# Altium PCB ThrusterBoard.PcbDoc
Units mil, origin at the board's own origin, x right, y up, seen from the top; angles counter-clockwise.
Board outline 11310 x 5450 mil, 2 copper layers (Top Layer, Bottom Layer); 24 components, 44 nets, 165 pads, 0 vias.
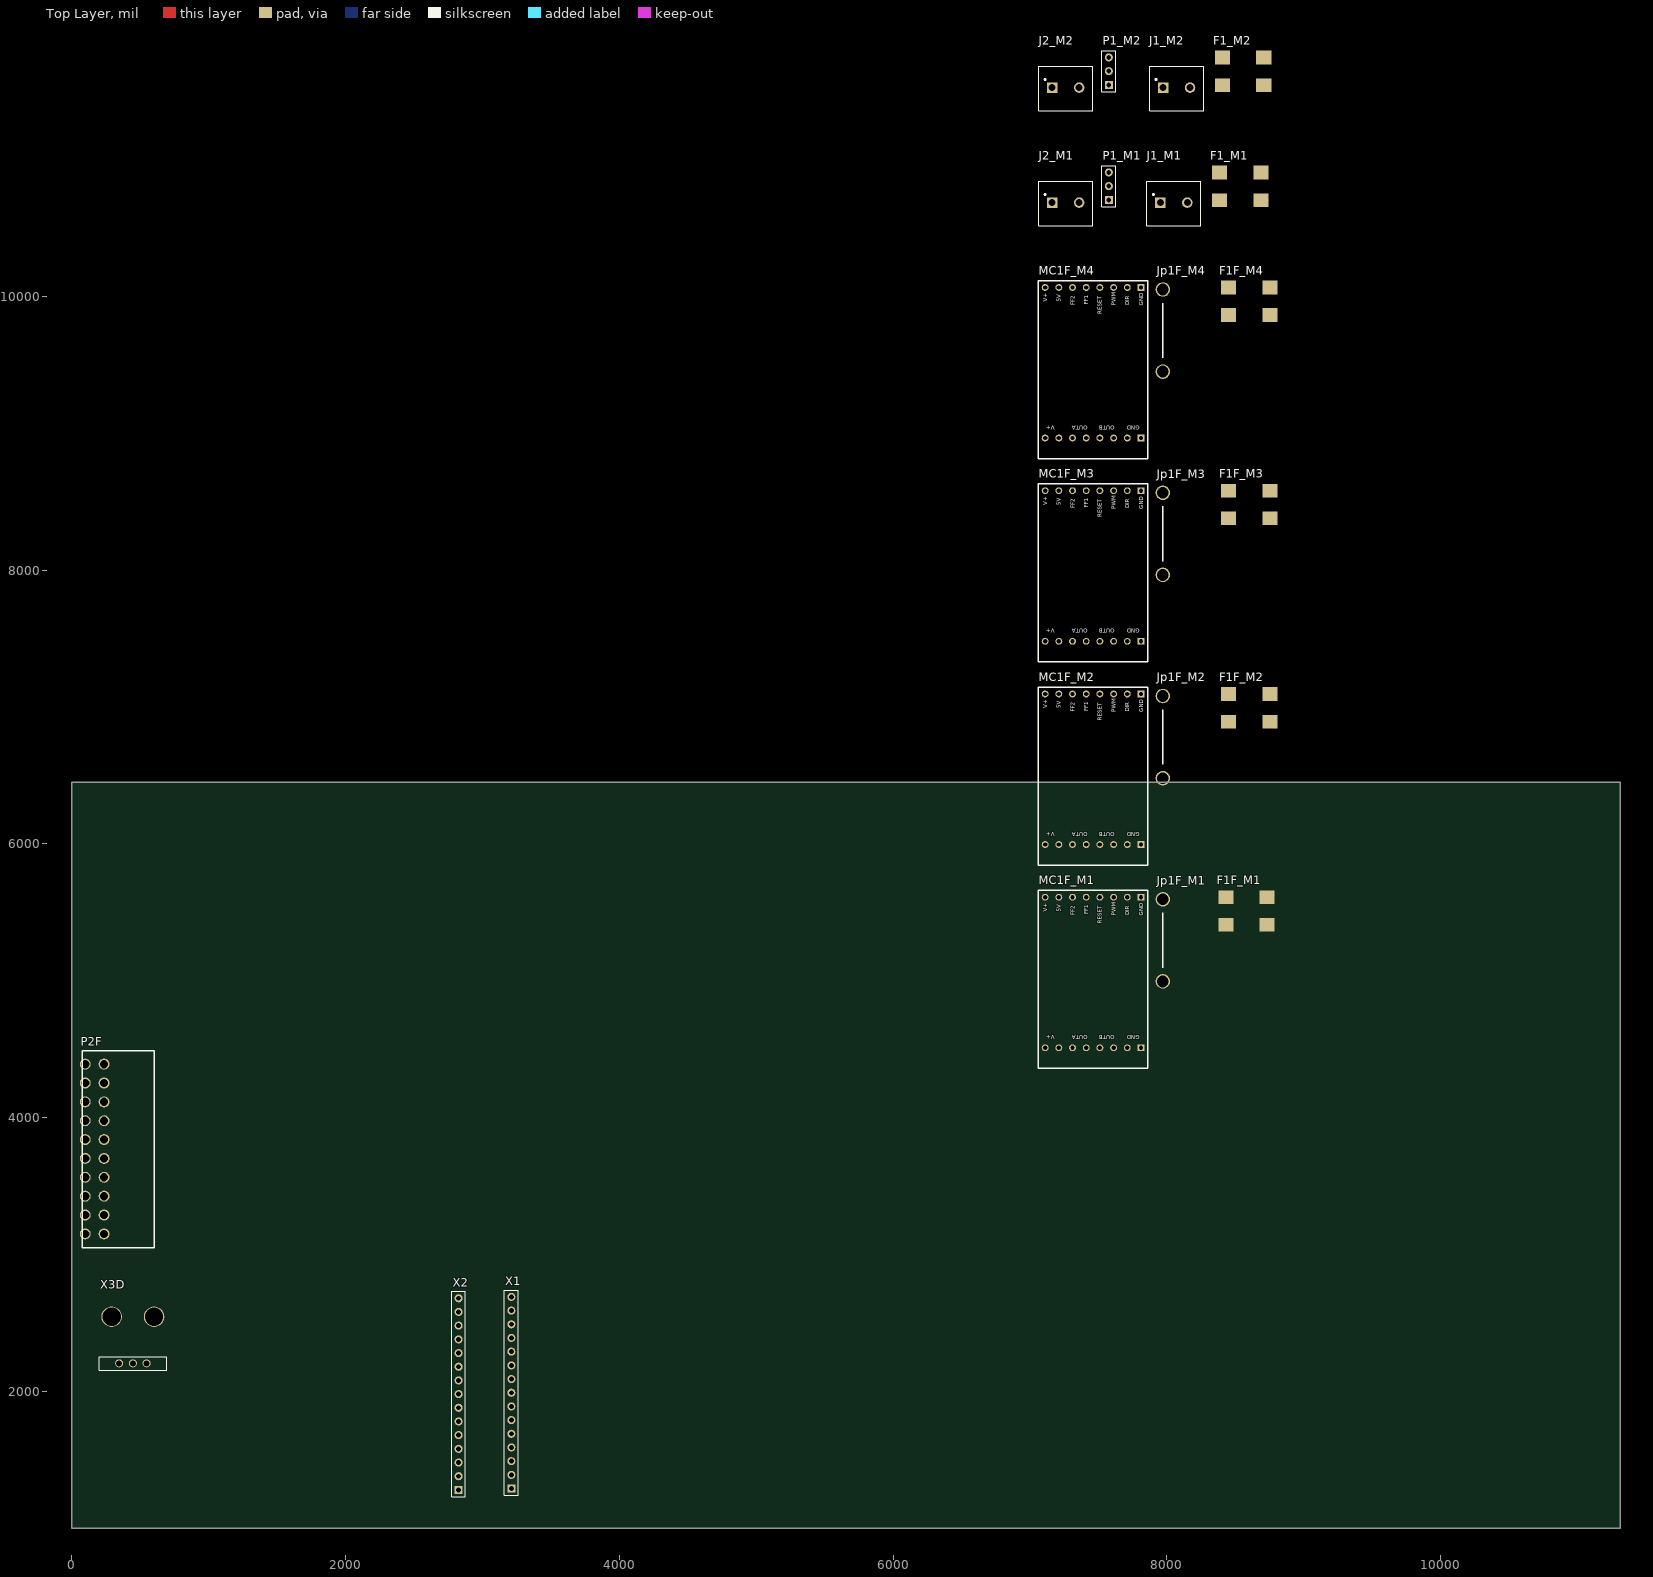
[diagram p0: Top Layer view]
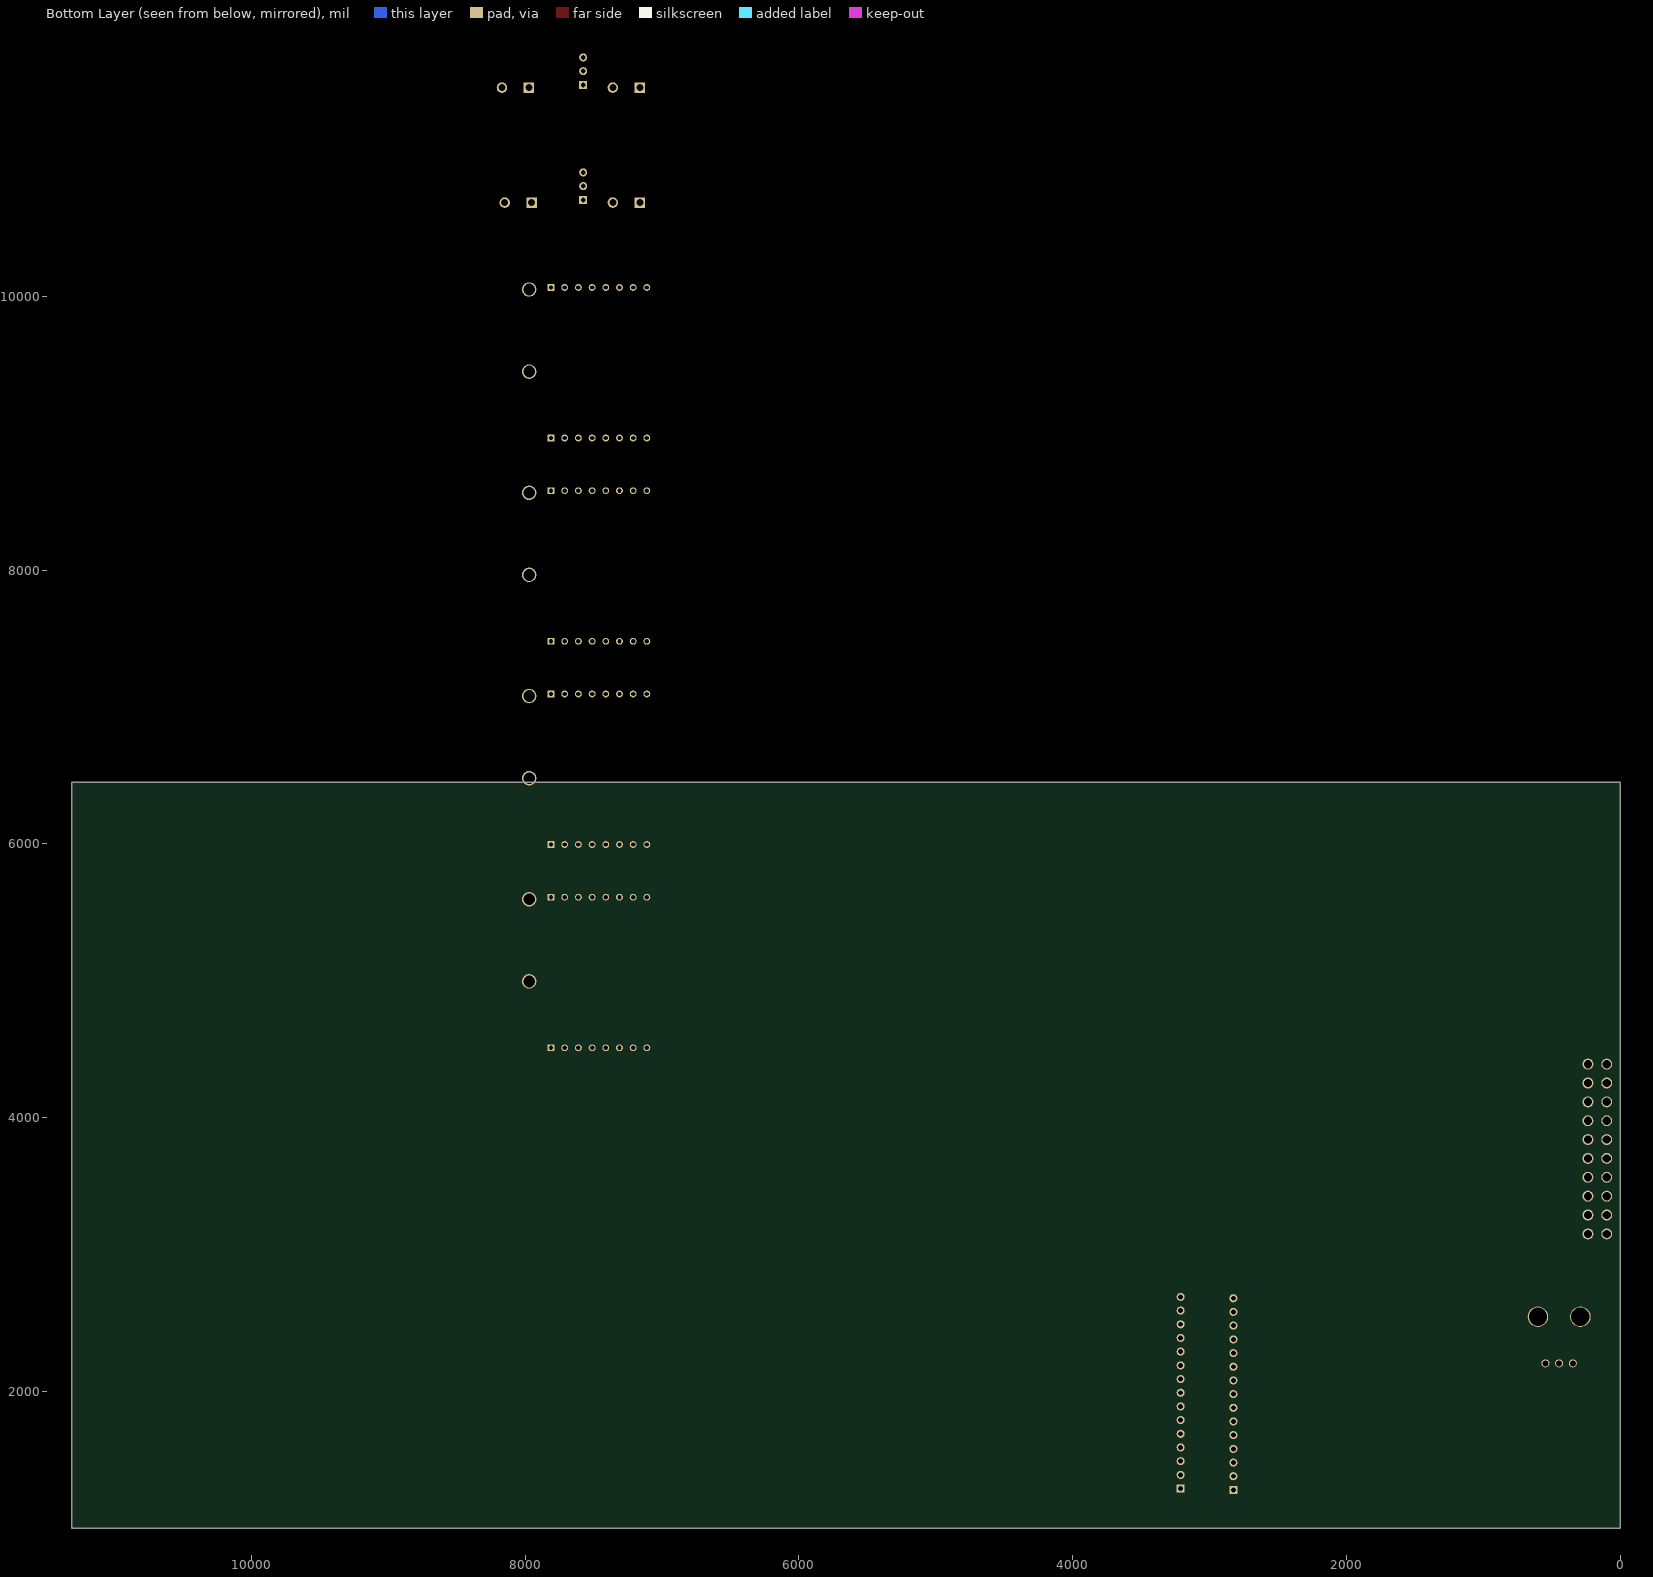
[diagram p1: Bottom Layer view, seen from below]

## Layer stack, top to bottom
Top Solder: solder mask 0.4, Solder Resist, Dk 3.5
Top Layer: signal copper 1.4
Dielectric 1: dielectric 12.6, FR-4, Dk 4.8
Bottom Layer: signal copper 1.4
Bottom Solder: solder mask 0.4, Solder Resist, Dk 3.5

## Board outline
0,1000 11310,1000 11310,6450 0,6450

## Design rules (kind name [scope] priority, off if disabled: settings)
Clearance [All] p1: gap=10 ignorepadtopadclearanceinfootprint=FALSE except(0: Arc-Hole Track-Hole SMDPad-Hole THPad-Hole Via-Hole Fill-Hole Poly-Hole Region-Hole Text-Hole)
PolygonConnect [All] p1: connectstyle=Relief reliefconductorwidth=10 reliefentries=4 polygonreliefangle="90 Angle" airgapwidth=10
RoomDefinition "Thruster Board" [InComponentClass('Thruster Board')] p1: confinementstyle=ConfineIn formatcopy=TRUE lockcomponents=FALSE outline 7755,0 8595,0 8595,1620 7755,1620
RoomDefinition "Motor Control" [InComponentClass('Motor Control')] p2: confinementstyle=ConfineIn formatcopy=TRUE lockcomponents=FALSE outline 5247.2,-941.77 6467.2,-941.77 6467.2,623.23 5247.2,623.23
RoomDefinition M4 [InComponentClass('M4')] p3: confinementstyle=ConfineIn formatcopy=TRUE lockcomponents=FALSE outline 7045,8805 8835,8805 8835,10235 7045,10235
RoomDefinition M3 [InComponentClass('M3')] p4: confinementstyle=ConfineIn formatcopy=TRUE lockcomponents=FALSE outline 7045,7320 8835,7320 8835,8750 7045,8750
RoomDefinition M_2 [InComponentClass('M2')] p5: confinementstyle=ConfineIn formatcopy=TRUE lockcomponents=FALSE outline 7045,5835 8835,5835 8835,7265 7045,7265
RoomDefinition M2 [InComponentClass('M2')] p6: confinementstyle=ConfineIn formatcopy=TRUE lockcomponents=FALSE outline 7045,5835 8835,5835 8835,7265 7045,7265
RoomDefinition M_1 [InComponentClass('M1')] p7: confinementstyle=ConfineIn formatcopy=TRUE lockcomponents=FALSE outline 12180,530 13950,530 13950,1960 12180,1960
RoomDefinition M1 [InComponentClass('M1')] p8: confinementstyle=ConfineIn formatcopy=TRUE lockcomponents=FALSE outline 7045,4350 8815,4350 8815,5780 7045,5780
RoutingVias [All] p1: holewidth=28 width=50 viastyle="Through Hole" minholewidth=28 minwidth=50 maxholewidth=28 maxwidth=50
SolderMaskExpansion [All] p1: expansion=4
Width [All] p1: maxlimit=10 minlimit=10 preferedwidth=10
30 further rules are at their usual default settings.

## Classes and differential pairs
channel class HBridges: M1 M2 M3 M4
channel class ESC: M1 M2
net class ThrusterPower: A5 A6 NetMC1F_M1_FF1 NetMC1F_M1_FF2 NetMC1F_M1_V+_SENSE NetMC1F_M2_FF1 NetMC1F_M2_FF2 NetMC1F_M2_V+_SENSE NetMC1F_M3_FF1 NetMC1F_M3_FF2 NetMC1F_M3_V+_SENSE NetMC1F_M4_FF1 NetMC1F_M4_FF2 NetMC1F_M4_V+_SENSE NetP2F_9 NetP2F_10 NetP2F_11 NetP2F_12 NetP2F_13 NetP2F_14 NetP2F_15 NetP2F_16 NetP2F_17 NetP2F_18 NetP2F_19 NetP2F_20
net class A[1..6]: A5 A6
component class "Motor Control": i2F i4F i5F i6F i7F i8F i9F
component class M4: i10F_M4 i11F_M4
component class M3: i10F_M3 i11F_M3
component class M2: i10F_M2 i11F_M2
component class M1: i10F_M1 i11F_M1

## Components (designator, comment, footprint, x,y, rotation, side; value= is the part's Value field where it differs from the comment)
F1_M1 "3569TR" "Horizontal SMD fuse clip" 8385,10905 r0 top (schematic designator F1)
F1_M2 "3569TR" "Horizontal SMD fuse clip" 8405,11745 r0 top (schematic designator F1)
F1F_M1 "3569TR" "Horizontal SMD fuse clip" 8430,5610 r0 top (schematic designator F1F)
F1F_M2 "3569TR" "Horizontal SMD fuse clip" 8450,7095 r0 top (schematic designator F1F)
F1F_M3 "3569TR" "Horizontal SMD fuse clip" 8450,8580 r0 top (schematic designator F1F)
F1F_M4 "3569TR" "Horizontal SMD fuse clip" 8450,10065 r0 top (schematic designator F1F)
J1_M1 "1935161" PHOENIX_1935161 8050,10685 r0 top (schematic designator J1)
J1_M2 "1935161" PHOENIX_1935161 8070,11525 r0 top (schematic designator J1)
J2_M1 "1935161" PHOENIX_1935161 7260,10685 r0 top (schematic designator J2)
J2_M2 "1935161" PHOENIX_1935161 7260,11525 r0 top (schematic designator J2)
Jp1F_M1 "Jumper" "Jumper, 12AWG, 0.6\"" 7970,5295 r90 top value=xxmil (schematic designator Jp1F)
Jp1F_M2 "Jumper" "Jumper, 12AWG, 0.6\"" 7970,6780 r90 top value=xxmil (schematic designator Jp1F)
Jp1F_M3 "Jumper" "Jumper, 12AWG, 0.6\"" 7970,8265 r90 top value=xxmil (schematic designator Jp1F)
Jp1F_M4 "Jumper" "Jumper, 12AWG, 0.6\"" 7970,9750 r90 top value=xxmil (schematic designator Jp1F)
MC1F_M1 "Motor Controller" "Pololu 24v12" 7460,5060 r90 top (schematic designator MC1F)
MC1F_M2 "Motor Controller" "Pololu 24v12" 7460,6545 r90 top (schematic designator MC1F)
MC1F_M3 "Motor Controller" "Pololu 24v12" 7460,8030 r90 top (schematic designator MC1F)
MC1F_M4 "Motor Controller" "Pololu 24v12" 7460,9515 r90 top (schematic designator MC1F)
P1_M1 "Header 3" HDR1X3 7575,10705 r90 top (schematic designator P1)
P1_M2 "Header 3" HDR1X3 7575,11545 r90 top (schematic designator P1)
P2F "MCDN 1,5/10-G1-3,5 P14THR" "MCDN 1,5/10-G1-3,5 P14THR w/ FMCD 1,5 9-ST-3,5" 97.2,3150.43 r90 top
X1 "Header 15" HDR1X15 3210,1290 r90 top
X2 "Header 15" HDR1X15 2825,1280 r90 top
X3D "70555-0037" 70555-0037 444.88,2204.84 r0 top

## Footprints (in the part's own frame and the unit in brackets; to place one, negate y for a bottom-side part, rotate by r counter-clockwise, add the part's x,y. Pads: shape width x height; smd on the part's side, far side on the other; paste and mask are expansions set on the pad)
70555-0037 [mm] "Molex C-Grid SL 70555, 3 Pin"
  round 1.5 hole 1.09: 1(-2.54,0) 2(0,0) 3(2.54,0)
  round 3.8 hole 3.4: M1(-3.94,8.64) M2(3.94,8.64)
  silkscreen extent -6.23,-1.25 6.25,1.25, body extent -5.71,-0.76 5.71,12.83, height 7.06
HDR1X3 [mm] "Connector; Header; 3 Position"
  rect 1.5x1.5 hole 0.9: 1(0,0)
  round 1.5 hole 0.9: 2(2.54,0) 3(5.08,0)
  silkscreen extent -1.27,-1.27 6.35,1.27
HDR1X15 [mm] "Connector; Header; 15 Position"
  rect 1.5x1.5 hole 0.9: 1(0,0)
  round 1.5 hole 0.9: 2(2.54,0) 3(5.08,0) 4(7.62,0) 5(10.16,0) 6(12.7,0) 7(15.24,0) 8(17.78,0) 9(20.32,0) 10(22.86,0) 11(25.4,0) 12(27.94,0) 13(30.48,0) 14(33.02,0) 15(35.56,0)
  silkscreen extent -1.27,-1.27 36.83,1.27
"Horizontal SMD fuse clip" [mil] "Fuse clip assembly for automotive fuses"
  rect 110x100 smd: 1(0,-202) 1(0,0) 2(302,-202) 2(302,0)
  body extent -78,-611 380,53, height 150
"Jumper, 12AWG, 0.6\"" [mil]
  round 105.8 hole 85.8: 1(-300,0) 2(300,0)
  silkscreen extent -200,0 200,0
"MCDN 1,5/10-G1-3,5 P14THR w/ FMCD 1,5 9-ST-3,5" [mm] "Header, Male, Dual Row, 9 Position, Horizontal w/ FMCD 1,5 9-ST-3,5"
  round 2.035 hole 1.527: 1(0,0) 2(0,-3.5) 3(3.5,0) 4(3.5,-3.5) 5(7,0) 6(7,-3.5) 7(10.5,0) 8(10.5,-3.5) 9(14,0) 10(14,-3.5) 11(17.5,0) 12(17.5,-3.5) 13(21,0) 14(21,-3.5) 15(24.5,0) 16(24.5,-3.5) 17(28,0) 18(28,-3.5) 19(31.5,0) 20(31.5,-3.5)
  silkscreen extent -2.55,-12.83 34.02,0.53, body extent -2.42,-29.47 33.97,0.6, height 16.09
PHOENIX_1935161 [mm]
  rect 1.95x1.95 hole 1.3: 1(-2.5,0)
  round 1.95 hole 1.3: 2(2.5,0)
  silkscreen extent -5,-4.3 5,4
"Pololu 24v12" [mil] "Pololu 24v12 Motor Driver"
  round 50 hole 32: 5V(550,250) DIR(550,-250) FF1(550,50) FF2(550,150) GND(-550,-250) OUTA(-550,50) OUTA(-550,150) OUTB(-550,-150) OUTB(-550,-50) PWM(550,-150) RESET(550,-50) V+(-550,250) V+(-550,350) V+_SENSE(550,350)
  rect 50x50 hole 32: GND(-550,-350) GND(550,-350)
  silkscreen extent -700,-400 600,400, body extent -700,-400 600,400, height 906

## Part data
F1_M1 F1_M2 F1F_M1 F1F_M2 F1F_M3 F1F_M4: "Fuse Clip Assembly", Manufacturer 1=KEYSTONE, Supplier Part Number 1=24T5056, ComponentLink1Description=http://www.farnell.com/datasheets/1703973.pdf, ComponentLink1URL=http://www.farnell.com/datasheets/1703973.pdf, Description 1="KEYSTONE - 3569TR - FUSE CLIP, AUTO BLADE, SMT", Manufacturer Part Number=3569TR, Pricing 1="1=0.798, 50=0.672, 100=0.644, 250=0.589, 500=0.566, 1000=0.491, 2500=0.427, 5000=0.413 (USD)", RoHS=YES, Stock 1=1000, Subassembly=Yes, Supplier 1=Newark
J1_M1 J1_M2 J2_M1 J2_M2: "Conn Terminal Blocks 2 POS 5mm Solder ST Thru-Hole 16A", Package=None, Availability=Unavailable, MF="Phoenix Contact", MP=1935161, Price=None, SnapEDA_Link=https://www.snapeda.com/parts/1935161/Phoenix%20Contact/view-part/?ref=snap
Jp1F_M1 Jp1F_M2 Jp1F_M3 Jp1F_M4: library part Jump, "Resistor"
MC1F_M1 MC1F_M2 MC1F_M3 MC1F_M4: library part "Pololu 24v12", "Pololu 24v12 Motor Driver", Supplier Part Number 1=24v12, Supplier 1=Pololu
P1_M1 P1_M2: "Header, 3-Pin", LatestRevisionDate=17-Jul-2002, LatestRevisionNote="Re-released for DXP Platform.", Publisher="Altium Limited"
P2F: "Header, 20-Pin"
X1 X2: "Header, 15-Pin", LatestRevisionDate=17-Jul-2002, LatestRevisionNote="Re-released for DXP Platform.", Publisher="Altium Limited"
X3D: "Molex, C-Grid SL 70555, 3 Pin", Manufacturer=MOLEX, Supplier Part Number 1=59H2958, ComponentLink1Description=http://www.farnell.com/cad/1737917.pdf, ComponentLink1URL=http://www.farnell.com/cad/1737917.pdf, ComponentLink2Description=http://www.farnell.com/datasheets/1947503.pdf, ComponentLink2URL=http://www.farnell.com/datasheets/1947503.pdf, ComponentLink3Description=http://www.farnell.com/cad/1980011.zip, ComponentLink3URL=http://www.farnell.com/cad/1980011.zip, Contact Plating="Gold Plated Contacts", Contact Termination Type="Through Hole", Gender=Header, No. of Contacts=3, No. of Rows=1, Pitch Spacing=2.54, Pricing 1="1=0.679, 10=0.622, 100=0.575, 500=0.575, 1000=0.534, 2000=0.495, 5000=0.484, 10000=0.47 (USD)", Product Range="SL 70555 Series", RoHS=YES, Stock 1=1580, Supplier 1=Newark

## Nets (pads, with @x,y where several pads share a name; then routed paths per layer and width w, separated by ;. In a path a pad name is that pad's centre, name@x,y a point inside that pad or via, vN(x,y) a via of type N, cw(c..) or ccw(c..) an arc to the next point about the centre after c; other vN are vias at no path point)
24V: 
+5: 
A0: 
A1: 
A2: 
A3: 
A4: 
B1: 
B2: 
B3: 
B4: 
D1: 
D2: 
D3: 
D4: 
DIR1: 
DIR2: 
DIR3: 
DIR4: 
GND: 
NetF1_M1_2: 
NetF1_M2_2: 
NetF1F_M1_2: 
NetF1F_M2_2: 
NetF1F_M3_2: 
NetF1F_M4_2: 
NetJp1F_M1_1: 
NetJp1F_M2_1: 
NetJp1F_M3_1: 
NetJp1F_M4_1: 
NetMC1F_M1_5V: 
NetMC1F_M2_5V: 
NetMC1F_M3_5V: 
NetMC1F_M4_5V: 
P1: 
P2: 
P3: 
P4: 
PWM1: 
PWM2: 
PWM3: 
PWM4: 
PWM5: 
PWM6: 
pads on no net: F1_M1.1 F1_M1.2 F1_M2.1 F1_M2.2 F1F_M1.1 F1F_M1.2 F1F_M2.1 F1F_M2.2 F1F_M3.1 F1F_M3.2 F1F_M4.1 F1F_M4.2 J1_M1.1 J1_M1.2 J1_M2.1 J1_M2.2 J2_M1.1 J2_M1.2 J2_M2.1 J2_M2.2 Jp1F_M1.1 Jp1F_M1.2 Jp1F_M2.1 Jp1F_M2.2 Jp1F_M3.1 Jp1F_M3.2 Jp1F_M4.1 Jp1F_M4.2 MC1F_M1.5V MC1F_M1.DIR MC1F_M1.FF1 MC1F_M1.FF2 MC1F_M1.GND MC1F_M1.OUTA MC1F_M1.OUTB MC1F_M1.PWM MC1F_M1.RESET MC1F_M1.V+ MC1F_M1.V+_SENSE MC1F_M2.5V MC1F_M2.DIR MC1F_M2.FF1 MC1F_M2.FF2 MC1F_M2.GND MC1F_M2.OUTA MC1F_M2.OUTB MC1F_M2.PWM MC1F_M2.RESET MC1F_M2.V+ MC1F_M2.V+_SENSE MC1F_M3.5V MC1F_M3.DIR MC1F_M3.FF1 MC1F_M3.FF2 MC1F_M3.GND MC1F_M3.OUTA MC1F_M3.OUTB MC1F_M3.PWM MC1F_M3.RESET MC1F_M3.V+ MC1F_M3.V+_SENSE MC1F_M4.5V MC1F_M4.DIR MC1F_M4.FF1 MC1F_M4.FF2 MC1F_M4.GND MC1F_M4.OUTA MC1F_M4.OUTB MC1F_M4.PWM MC1F_M4.RESET MC1F_M4.V+ MC1F_M4.V+_SENSE P1_M1.1 P1_M1.2 P1_M1.3 P1_M2.1 P1_M2.2 P1_M2.3 P2F.1 P2F.2 P2F.3 P2F.4 P2F.5 P2F.6 P2F.7 P2F.8 P2F.9 P2F.10 P2F.11 P2F.12 P2F.13 P2F.14 P2F.15 P2F.16 P2F.17 P2F.18 P2F.19 P2F.20 X1.1 X1.2 X1.3 X1.4 X1.5 X1.6 X1.7 X1.8 X1.9 X1.10 X1.11 X1.12 X1.13 X1.14 X1.15 X2.1 X2.2 X2.3 X2.4 X2.5 X2.6 X2.7 X2.8 X2.9 X2.10 X2.11 X2.12 X2.13 X2.14 X2.15 X3D.1 X3D.2 X3D.3 X3D.M1 X3D.M2

## Text inside footprints (layer, text, board x,y; h text height)
J1_M1: Mechanical 4 "VALUE" at 7849.49,10424.53 h73.82; Mechanical 4 "NAME" at 7849.72,10875.43 h73.82; Mechanical 4 "VALUE" at 7849.49,10424.53 h73.82; Mechanical 4 "NAME" at 7849.72,10875.43 h73.82
J1_M2: Mechanical 4 "VALUE" at 7869.49,11264.53 h73.82; Mechanical 4 "NAME" at 7869.72,11715.43 h73.82; Mechanical 4 "VALUE" at 7869.49,11264.53 h73.82; Mechanical 4 "NAME" at 7869.72,11715.43 h73.82
J2_M1: Mechanical 4 "VALUE" at 7059.49,10424.53 h73.82; Mechanical 4 "NAME" at 7059.72,10875.43 h73.82; Mechanical 4 "VALUE" at 7059.49,10424.53 h73.82; Mechanical 4 "NAME" at 7059.72,10875.43 h73.82
J2_M2: Mechanical 4 "VALUE" at 7059.49,11264.53 h73.82; Mechanical 4 "NAME" at 7059.72,11715.43 h73.82; Mechanical 4 "VALUE" at 7059.49,11264.53 h73.82; Mechanical 4 "NAME" at 7059.72,11715.43 h73.82
MC1F_M1: Top Overlay "GND" at 7825,5475 h30 r90; Top Overlay "DIR" at 7725,5480 h30 r90; Top Overlay "PWM" at 7625,5475 h30 r90; Top Overlay "RESET" at 7525,5415 h30 r90; Top Overlay "FF1" at 7425,5485 h30 r90; Top Overlay "FF2" at 7325,5480 h30 r90; Top Overlay "5V" at 7225,5505 h30 r90; Top Overlay "V+" at 7125,5505 h30 r90; Top Overlay "V+" at 7180,4600 h30 r180; Top Overlay "OUTA" at 7420,4600 h30 r180; Top Overlay "OUTB" at 7620,4600 h30 r180; Top Overlay "GND" at 7800,4600 h30 r180
MC1F_M2: Top Overlay "GND" at 7825,6960 h30 r90; Top Overlay "DIR" at 7725,6965 h30 r90; Top Overlay "PWM" at 7625,6960 h30 r90; Top Overlay "RESET" at 7525,6900 h30 r90; Top Overlay "FF1" at 7425,6970 h30 r90; Top Overlay "FF2" at 7325,6965 h30 r90; Top Overlay "5V" at 7225,6990 h30 r90; Top Overlay "V+" at 7125,6990 h30 r90; Top Overlay "V+" at 7180,6085 h30 r180; Top Overlay "OUTA" at 7420,6085 h30 r180; Top Overlay "OUTB" at 7620,6085 h30 r180; Top Overlay "GND" at 7800,6085 h30 r180
MC1F_M3: Top Overlay "GND" at 7825,8445 h30 r90; Top Overlay "DIR" at 7725,8450 h30 r90; Top Overlay "PWM" at 7625,8445 h30 r90; Top Overlay "RESET" at 7525,8385 h30 r90; Top Overlay "FF1" at 7425,8455 h30 r90; Top Overlay "FF2" at 7325,8450 h30 r90; Top Overlay "5V" at 7225,8475 h30 r90; Top Overlay "V+" at 7125,8475 h30 r90; Top Overlay "V+" at 7180,7570 h30 r180; Top Overlay "OUTA" at 7420,7570 h30 r180; Top Overlay "OUTB" at 7620,7570 h30 r180; Top Overlay "GND" at 7800,7570 h30 r180
MC1F_M4: Top Overlay "GND" at 7825,9930 h30 r90; Top Overlay "DIR" at 7725,9935 h30 r90; Top Overlay "PWM" at 7625,9930 h30 r90; Top Overlay "RESET" at 7525,9870 h30 r90; Top Overlay "FF1" at 7425,9940 h30 r90; Top Overlay "FF2" at 7325,9935 h30 r90; Top Overlay "5V" at 7225,9960 h30 r90; Top Overlay "V+" at 7125,9960 h30 r90; Top Overlay "V+" at 7180,9055 h30 r180; Top Overlay "OUTA" at 7420,9055 h30 r180; Top Overlay "OUTB" at 7620,9055 h30 r180; Top Overlay "GND" at 7800,9055 h30 r180